# Altium PCB PCB1.PcbDoc
Units mm, origin at the board's own origin, x right, y up, seen from the top; angles counter-clockwise.
Board outline 60 x 54.52 mm, 2 copper layers (Top Layer, Bottom Layer); 18 components, 12 nets, 95 pads, 41 vias.
Unrouted connection lines stored in the file: 52.
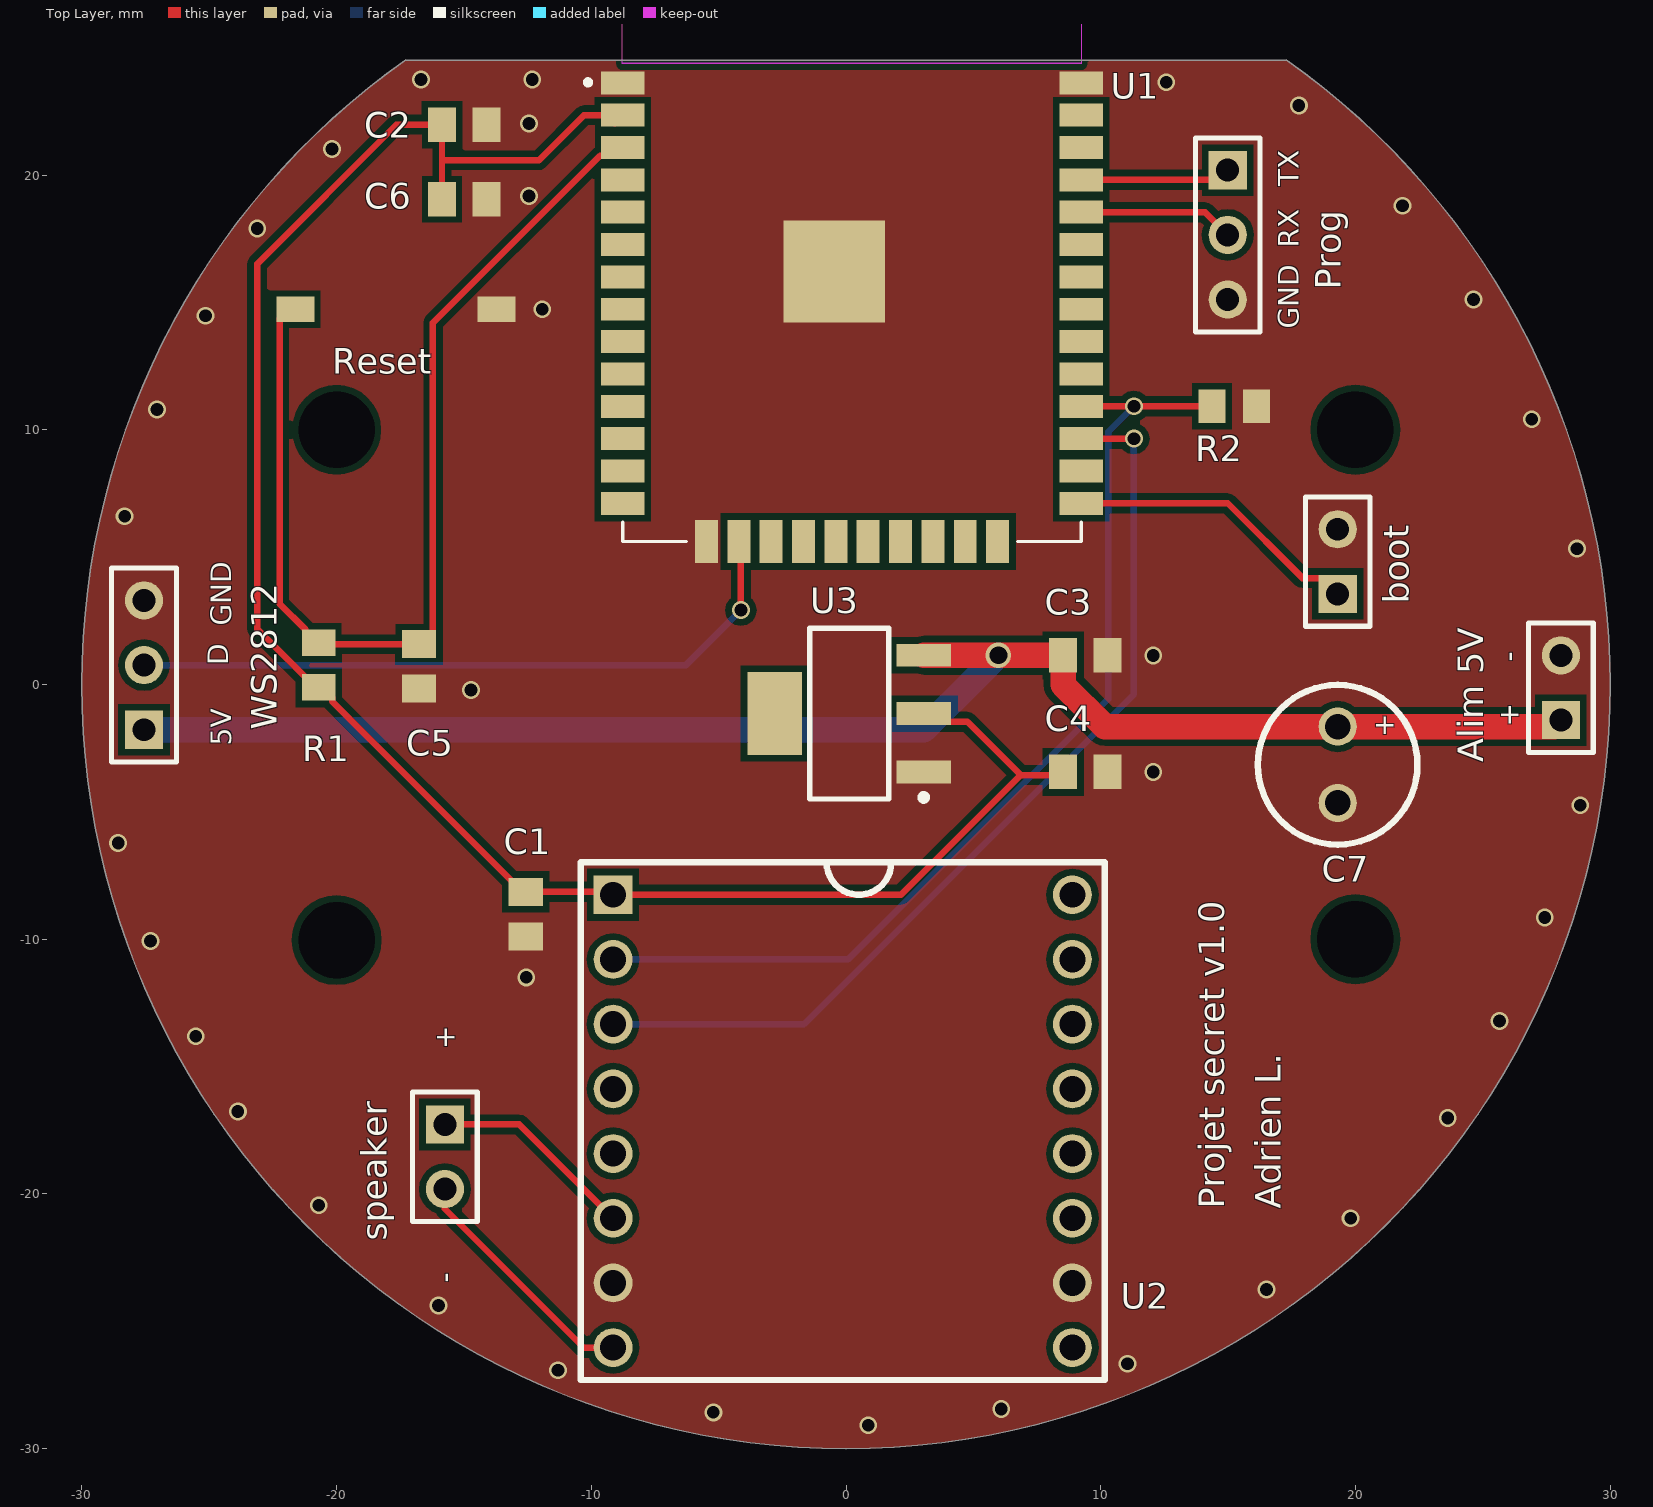
[diagram p0: Top Layer view]
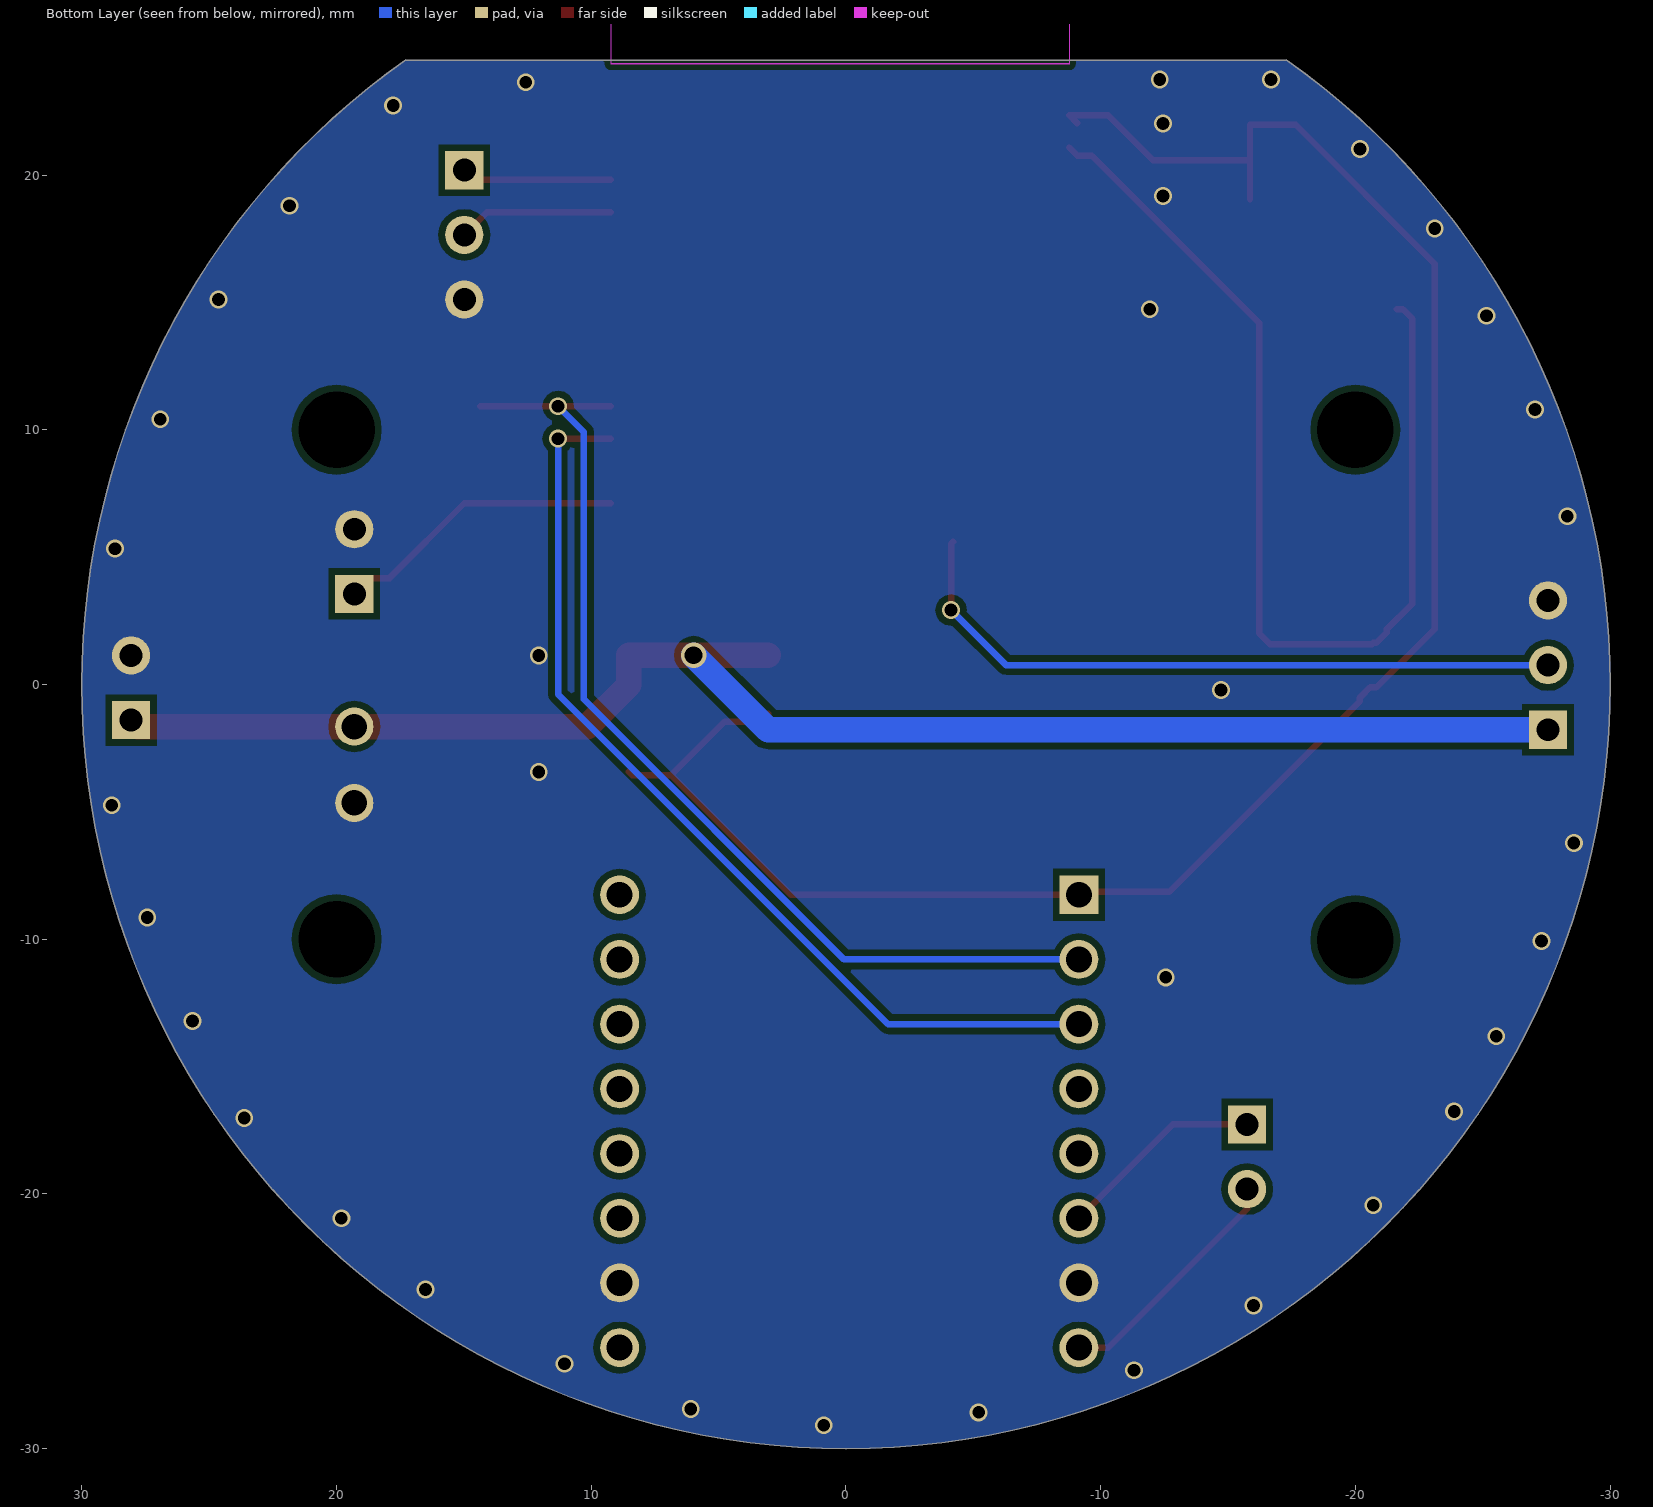
[diagram p1: Bottom Layer view, seen from below]
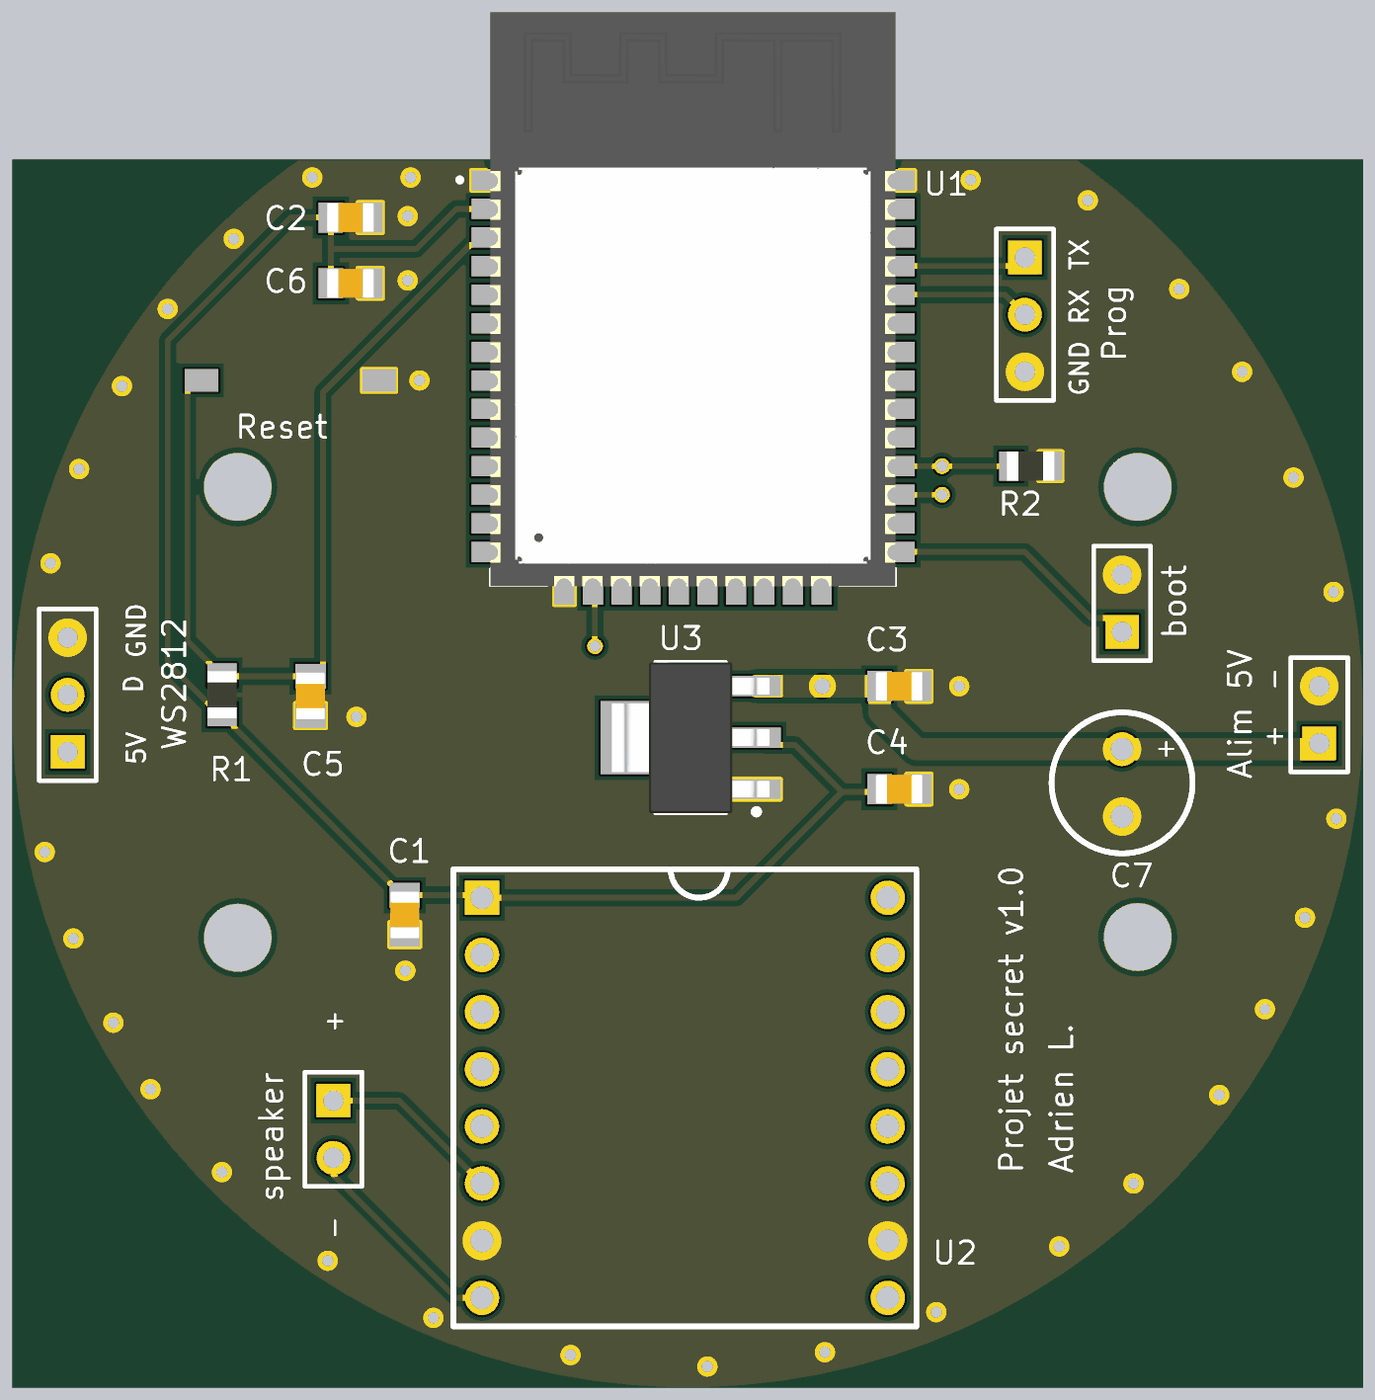
[diagram p2: 3D render of the assembled board from above, using the file's embedded part models]

## Layer stack, top to bottom
Top Solder: solder mask 0.0102, Solder Resist, Dk 3.5
Top Layer: signal copper 0.0356
Dielectric 1: dielectric 0.32, FR-4, Dk 4.8
Bottom Layer: signal copper 0.0356
Bottom Solder: solder mask 0.0102, Solder Resist, Dk 3.5

## Board outline
17.281,24.523 17.268,24.511 -17.272,24.511 -17.281,24.523 ccw(c0,0) -30,0 ccw(c0,0) 0,-30 ccw(c0,0) 30,0 ccw(c0,0)

## Design rules (kind name [scope] priority, off if disabled: settings)
Clearance [All] p1: gap=0.254 ignorepadtopadclearanceinfootprint=FALSE except(0: Arc-Hole Track-Hole SMDPad-Hole THPad-Hole Via-Hole Fill-Hole Poly-Hole Region-Hole Text-Hole)
HoleSize [All] p1: absolutevalues=TRUE maxlimit=20 minlimit=0.025 maxpercent=80.000 minpercent=20.000
PolygonConnect [All] p1: connectstyle=Direct reliefconductorwidth=0.254 reliefentries=4 polygonreliefangle="90 Angle" airgapwidth=0.254
RoutingVias [All] p1: holewidth=0.711 width=1.27 viastyle="Through Hole" minholewidth=0.711 minwidth=1.27 maxholewidth=0.711 maxwidth=1.27
SolderMaskExpansion [All] p1: expansion=0.102
Width [All] p1: maxlimit=1 minlimit=0.254 preferedwidth=0.254 minimp=50.000000 maximp=50.000000 favimp=50.000000
29 further rules are at their usual default settings.

## Components (designator, comment, footprint, x,y, rotation, side; value= is the part's Value field where it differs from the comment)
"Alim 5V" "Header 2" HDR1X2 28.067,-1.397 r90 top
boot "Header 2" HDR1X2 19.304,3.556 r90 top
C1 "C" "CAP 0805" -12.573,-9.017 r270 top
C2 "C" "CAP 0805" -14.986,21.971 r0 top
C3 "C" "CAP 0805" 9.398,1.143 r0 top
C4 "C" "CAP 0805" 9.398,-3.429 r0 top
C5 "C" "CAP 0805" -16.764,0.711 r270 top
C6 "C" "CAP 0805" -14.986,19.05 r0 top
C7 "Cpol" SMD_capacitor 19.304,-1.651 r270 top
Prog "Header 3" HDR1X3 14.986,20.193 r270 top
R1 "R" "RES 0805" -20.701,0.762 r90 top
R2 "R" "RES 0805" 15.24,10.922 r0 top
Reset "button" button_pcb -21.616,14.732 r0 top (schematic designator reset)
speaker "Header 2" HDR1X2 -15.748,-17.272 r270 top
U1 "esp wroom 32" esp32 -0.398,16.002 r0 top
U2 "DFPlayer" DFPlayer -9.144,-18.415 r0 top
U3 "AMS1117" SOT229P700X180-4N 0.127,-1.143 r180 top
WS2812 "Header 3" HDR1X3 -27.559,-1.778 r90 top

## Footprints (in the part's own frame and the unit in brackets; to place one, negate y for a bottom-side part, rotate by r counter-clockwise, add the part's x,y. Pads: shape width x height; smd on the part's side, far side on the other; paste and mask are expansions set on the pad)
button_pcb [mm]
  rect 1.5x1 smd: 1(0,0) 2(7.9,0)
"CAP 0805" [mm] "Chip Capacitor, 2-Leads, Body 2,00x1,20mm, IPC Medium Density"
  rect 1.1x1.35 smd: 1(-0.875,0) 2(0.875,0)
  body extent -1.05,-0.65 1.05,0.65, height 0.6
DFPlayer [mil]
  rect 60x60 hole 40: 1(0,400)
  round 60 hole 40: 2(0,300) 3(0,200) 4(0,100) 5(0,0) 6(0,-100) 7(0,-200) 8(0,-300) 9(710,-300) 10(710,-200) 11(710,-100) 12(710,0) 13(710,100) 14(710,200) 15(710,300) 16(710,400)
  silkscreen extent -50,-350 760,450, body extent -50,-350 760,450, height 50
esp32 [mm]
  rect 1.7x0.9 smd: 1(-8.365,7.62) 2(-8.365,6.35) 3(-8.365,5.08) 4(-8.365,3.81) 5(-8.365,2.54) 6(-8.365,1.27) 7(-8.365,0) 8(-8.365,-1.27) 9(-8.365,-2.54) 10(-8.365,-3.81) 11(-8.365,-5.08) 12(-8.365,-6.35) 13(-8.365,-7.62) 14(-8.365,-8.89) 25(9.635,-8.89) 26(9.635,-7.62) 27(9.635,-6.35) 28(9.635,-5.08) 29(9.635,-3.81) 30(9.635,-2.54) 31(9.635,-1.27) 32(9.635,0) 33(9.635,1.27) 34(9.635,2.54) 35(9.635,3.81) 36(9.635,5.08) 37(9.635,6.35) 38(9.635,7.62)
  rect 4x4 smd: 1.1(-0.065,0.21)
  rect 0.9x1.7 smd: 15(-5.08,-10.39) 16(-3.81,-10.39) 17(-2.54,-10.39) 18(-1.27,-10.39) 19(0,-10.39) 20(1.27,-10.39) 21(2.54,-10.39) 22(3.81,-10.39) 23(5.08,-10.39) 24(6.35,-10.39)
  Keep-Out Layer region: -8.389,15.115 9.635,15.115 9.635,8.389 -8.389,8.389
  Keep-Out Layer region: -8.377,15.115 9.635,15.115 9.635,8.377 -8.377,8.377
  Keep-Out Layer region: -8.391,15.115 9.635,15.115 9.635,8.391 -8.391,8.391
  Keep-Out Layer region: -8.389,15.115 9.635,15.115 9.635,8.389 -8.389,8.389
  Keep-Out Layer region: -8.377,15.115 9.635,15.115 9.635,8.377 -8.377,8.377
  Keep-Out Layer region: -8.391,15.115 9.635,15.115 9.635,8.391 -8.391,8.391
  Keep-Out Layer region: -8.389,15.115 9.635,15.115 9.635,8.389 -8.389,8.389
  Keep-Out Layer region: -8.377,15.115 9.635,15.115 9.635,8.377 -8.377,8.377
  Keep-Out Layer region: -8.391,15.115 9.635,15.115 9.635,8.391 -8.391,8.391
  silkscreen extent -9.83,-10.39 9.63,7.74, body extent -8.38,-10.41 9.62,15.09, height 3.25
HDR1X2 [mm] "Connector; Header; 2 Position"
  rect 1.5x1.5 hole 0.9: 1(0,0)
  round 1.5 hole 0.9: 2(2.54,0)
  silkscreen extent -1.27,-1.27 3.81,1.27
HDR1X3 [mm] "Connector; Header; 3 Position"
  rect 1.5x1.5 hole 0.9: 1(0,0)
  round 1.5 hole 0.9: 2(2.54,0) 3(5.08,0)
  silkscreen extent -1.27,-1.27 6.35,1.27
"RES 0805" [mm] "Chip Resistor, 2-Leads, Body 2,00x1,20mm, IPC Medium Density"
  rect 1.05x1.3 smd: 1(-0.875,0) 2(0.875,0)
  body extent -1.05,-0.65 1.05,0.65, height 0.6
SMD_capacitor [mm]
  round 1.5 hole 1: 1(0,0) 2(3,0)
  silkscreen extent -1.63,-3.13 4.63,3.13
SOT229P700X180-4N [mm] "SOT223, 4-Leads, Body 6,50x7,00mm (avg), Pitch 2,29mm, IPC Medium Density"
  rect 2.15x0.9 smd: 1(-2.925,2.29) 2(-2.925,0) 3(-2.925,-2.29)
  rect 2.15x3.25 smd: 4(2.925,0)
  silkscreen extent -3.05,-3.35 1.55,3.41, body extent -3.5,-3.35 3.5,3.35, height 1.8

## Part data
"Alim 5V" boot speaker: "Header, 2-Pin", LatestRevisionDate=17-Jul-2002, LatestRevisionNote="Re-released for DXP Platform.", Publisher="Altium Limited"
Prog WS2812: "Header, 3-Pin", LatestRevisionDate=17-Jul-2002, LatestRevisionNote="Re-released for DXP Platform.", Publisher="Altium Limited"
U1: "ESP32-WROOM-32 generic Wi-Fi+BT+BLE MCU module", ComponentLink1Description=product_page, ComponentLink1URL=https://www.espressif.com/sites/default/files/documentation/esp32-wroom-32_datasheet_en.pdf
U2: "serial MP3 module"
U3: "1A LOW DROPOUT VOLTAGE REGULATOR"

## Free pads (board coordinates)
  round 1.524 hole 3 paste+0 mask+0: 24(-20,-10.033) 24(-20,10) 24(20,-10) 24(20,10)

## Via types
v1: diameter 0.7, hole 0.5, Top Layer to Bottom Layer, 40 vias
v2: diameter 1, hole 0.7, Top Layer to Bottom Layer, 1 vias

## Nets (pads, with @x,y where several pads share a name; then routed paths per layer and width w, separated by ;. In a path a pad name is that pad's centre, name@x,y a point inside that pad or via, vN(x,y) a via of type N, cw(c..) or ccw(c..) an arc to the next point about the centre after c; other vN are vias at no path point)
3V3: C1.1 C2.1 C4.1 C6.1 R1.1 U1.2 U2.1 U3.2 | length 77.9
  Top Layer w0.254: C6.1 -15.861,20.511 ; U1.2@-9.086,22.029 U1.2 -10.287,22.352 -12.065,20.574 -15.797,20.574 -15.861,20.511 ; U3.2 3.375,-1.466 4.768,-1.466 6.858,-3.556 ; C4.1 8.396,-3.556 6.858,-3.556 ; -15.861,20.511 C2.1 -17.653,21.971 -23.114,16.51 -23.114,2.175 -20.826,-0.113 R1.1 -20.576,-0.113 -20.178,-0.511 -20.178,-0.662 -12.698,-8.142 C1.1 -9.257,-8.142 U2.1 2.159,-8.255 6.858,-3.556
5V: "Alim 5V.1" C3.1 C7.1 U3.3 WS2812.1 | length 62.3
  Top Layer w0.254: C3.1@8.519,1.147 C3.1 ; 27.813,-1.651 28.067,-1.397
  Top Layer w1: U3.3 v2(5.984,1.147) C3.1@8.519,1.147 ; C3.1 8.523,-0.014 10.16,-1.651 C7.1 27.813,-1.651
  Bottom Layer w0.254: 27.686,-1.778 28.067,-1.397
  Bottom Layer w1: WS2812.1 3.059,-1.778 v2(5.984,1.147)
en_esp: C5.1 R1.2 Reset.1 U1.3 | length 41.4
  Top Layer w0.254: Reset.1 -21.866,14.732 -22.239,14.359 -22.239,3.175 -21.224,2.16 -21.224,2.035 -20.826,1.637 R1.2 -20.65,1.586 C5.1 -16.639,1.586 -16.216,2.009 -16.216,14.198 -9.655,20.759 -9.086,20.759 U1.3
esp_rx: U1.27 U2.3 | length 37.9
  Top Layer w0.254: U1.27 v1(11.303,9.652)
  Bottom Layer w0.254: U2.3 -1.651,-13.335 11.303,-0.381 v1(11.303,9.652)
esp_tx: R2.1 U1.28 U2.2 | length 40.7
  Top Layer w0.254: U1.28 v1(11.303,10.922) R2.1
  Bottom Layer w0.254: U2.2 0.078,-10.795 10.288,-0.585 10.288,9.907 v1(11.303,10.922)
GND: "Alim 5V.2" boot.2 C1.2 C2.2 C3.2 C4.2 C5.2 C6.2 C7.2 Prog.3 R2.2 Reset.2 U1.1 U1.1.1 U1.15 U1.38 U2.7 U2.10 U3.1 WS2812.3
  other v1: 0.872,-29.083 -5.207,-28.575 6.096,-28.448 -11.303,-26.924 11.049,-26.67 -16.002,-24.384 16.51,-23.749 19.812,-20.955 -20.701,-20.447 23.622,-17.018 -23.876,-16.764 -25.527,-13.809 25.654,-13.208 -12.552,-11.498 -27.305,-10.067 27.432,-9.144 -28.575,-6.223 28.829,-4.743 12.065,-3.433 -14.72,-0.216 12.065,1.143 28.702,5.334 -28.321,6.604 26.924,10.414 -27.051,10.795 -25.146,14.478 -11.923,14.732 24.638,15.113 -23.114,17.907 21.844,18.796 -12.446,19.177 -20.178,21.021 -12.446,22.029 17.78,22.733 12.573,23.642 -16.686,23.749 -12.319,23.749
Netboot_1: boot.1 U1.25 | length 11.5
  Top Layer w0.254: U1.25 14.986,7.112 17.919,4.179 18.681,4.179 boot.1
rx_esp: Prog.2 U1.34 | length 6.1
  Top Layer w0.254: U1.34 14.097,18.542 Prog.2
speaker_+: speaker.1 U2.6 | length 8.1
  Top Layer w0.254: speaker.1 -12.827,-17.272 U2.6
speaker_-: speaker.2 U2.8 | length 9.6
  Top Layer w0.254: speaker.2 -15.748,-20.582 -10.295,-26.035 U2.8
tx_esp: Prog.1 U1.35 | length 5.9
  Top Layer w0.254: U1.35 14.605,19.812 Prog.1
ws2812: U1.16 WS2812.2 | length 27.1
  Top Layer w0.254: U1.16 -4.123,5.527 v1(-4.123,2.921)
  Bottom Layer w0.254: WS2812.2 -6.282,0.762 v1(-4.123,2.921)
pads on no net: U1.4 U1.5 U1.6 U1.7 U1.8 U1.9 U1.10 U1.11 U1.12 U1.13 U1.14 U1.17 U1.18 U1.19 U1.20 U1.21 U1.22 U1.23 U1.24 U1.26 U1.29 U1.30 U1.31 U1.32 U1.33 U1.36 U1.37 U2.4 U2.5 U2.9 U2.11 U2.12 U2.13 U2.14 U2.15 U2.16 U3.4

## Polygon pours and split planes (outlines as drawn)
GND on Bottom Layer "GND_L02_P018" (solid, pour order 18): 17.281,24.523 17.268,24.511 -17.272,24.511 -17.281,24.523 ccw(c0,0) -30,0 ccw(c0,0) 0,-30 ccw(c0,0) 30,0 ccw(c0,0)
GND on Top Layer "GND_L01_P017" (solid, pour order 17): 17.281,24.523 17.268,24.511 -17.272,24.511 -17.281,24.523 ccw(c0,0) -30,0 ccw(c0,0) 0,-30 ccw(c0,0) 30,0 ccw(c0,0)

## Silkscreen, mask and mechanical layers (free items; w line width, h text height)
Top Overlay:
  text "TX" at 17.78,19.558 h0.8 r90
  text "RX" at 17.78,17.145 h0.8 r90
  text "GND" at 17.78,13.97 h0.8 r90
  text "GND" at -24.13,2.316 h0.8 r90
  text "-" at 26.416,0.889 h0.8 r90
  text "D" at -24.257,0.762 h0.8 r90
  text "+" at 26.416,-1.651 h0.8 r90
  text "5V" at -24.13,-2.413 h0.8 r90
  text "+" at -15.367,-14.325 h0.8 r90
  text "Projet secret v1.0" at 14.859,-20.574 h1 r90
  text "Adrien L." at 17.074,-20.574 h1 r90
  text "-" at -15.367,-23.495 h0.8 r90
Mechanical 1:
  lines w0.2: -17.281,24.523 ccw(c0,0) -30,0 ccw(c0,0) 0,-30 ccw(c0,0) 30,0 ccw(c0,0) 17.281,24.523 ; -17.272,24.511 17.268,24.511

## Text inside footprints (layer, text, board x,y; h text height)
C7: Top Overlay "+" at 20.704,-1.951 h0.8